# Altium PCB CTR-Dome-Rev-A.PcbDoc
Units mil, origin at the board's own origin, x right, y up, seen from the top; angles counter-clockwise.
Board outline 2755.91 x 2755.91 mil, 2 copper layers (Top Layer, q), stack 61.2 mil thick; 35 components, 26 nets, 112 pads, 51 vias.
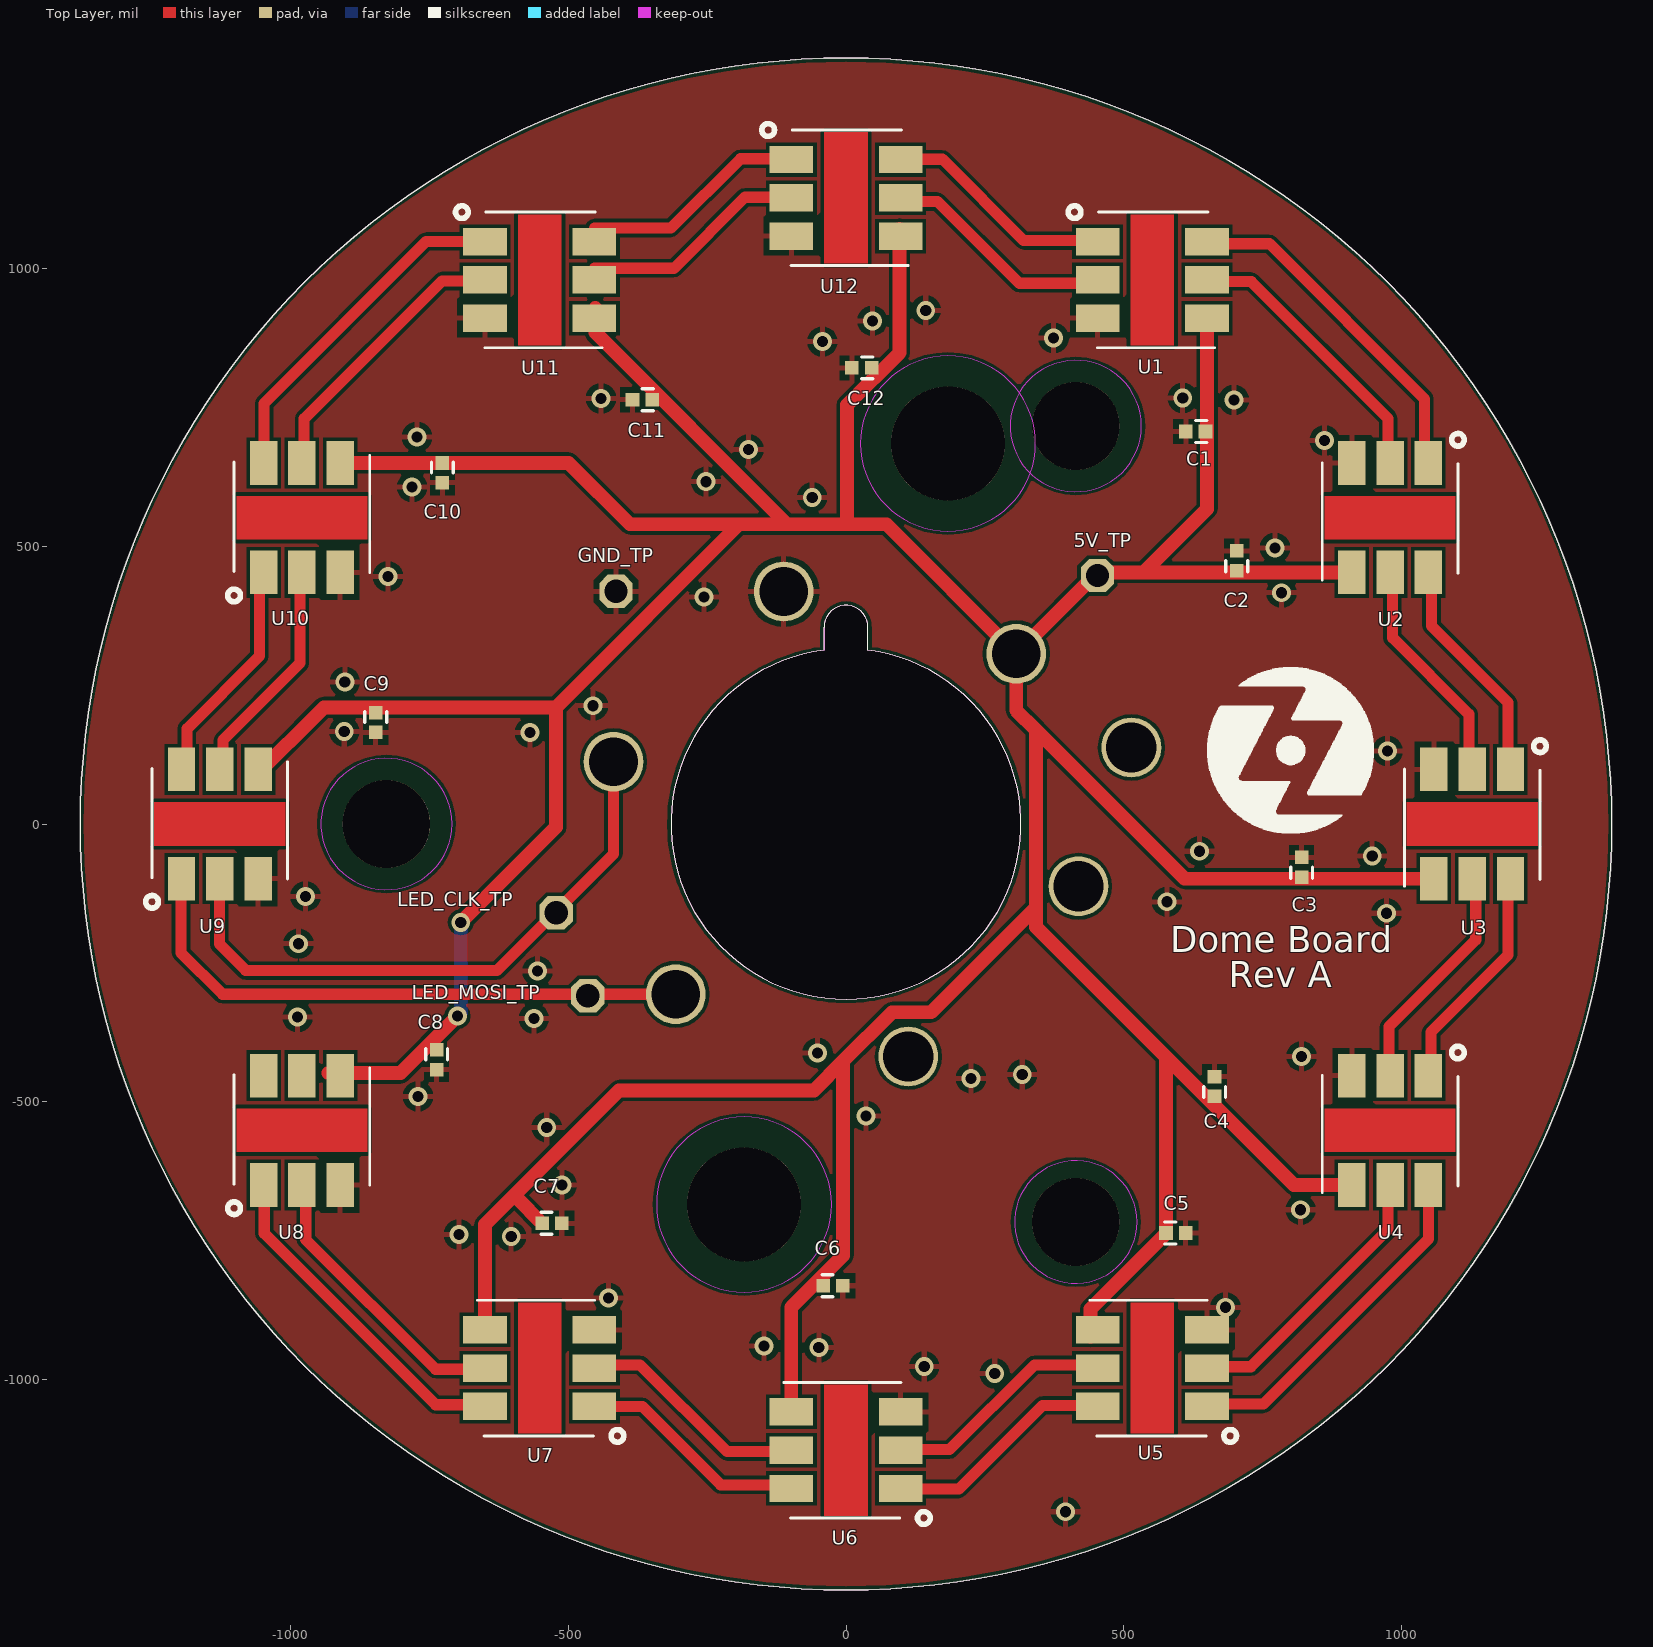
[diagram p0: Top Layer view]
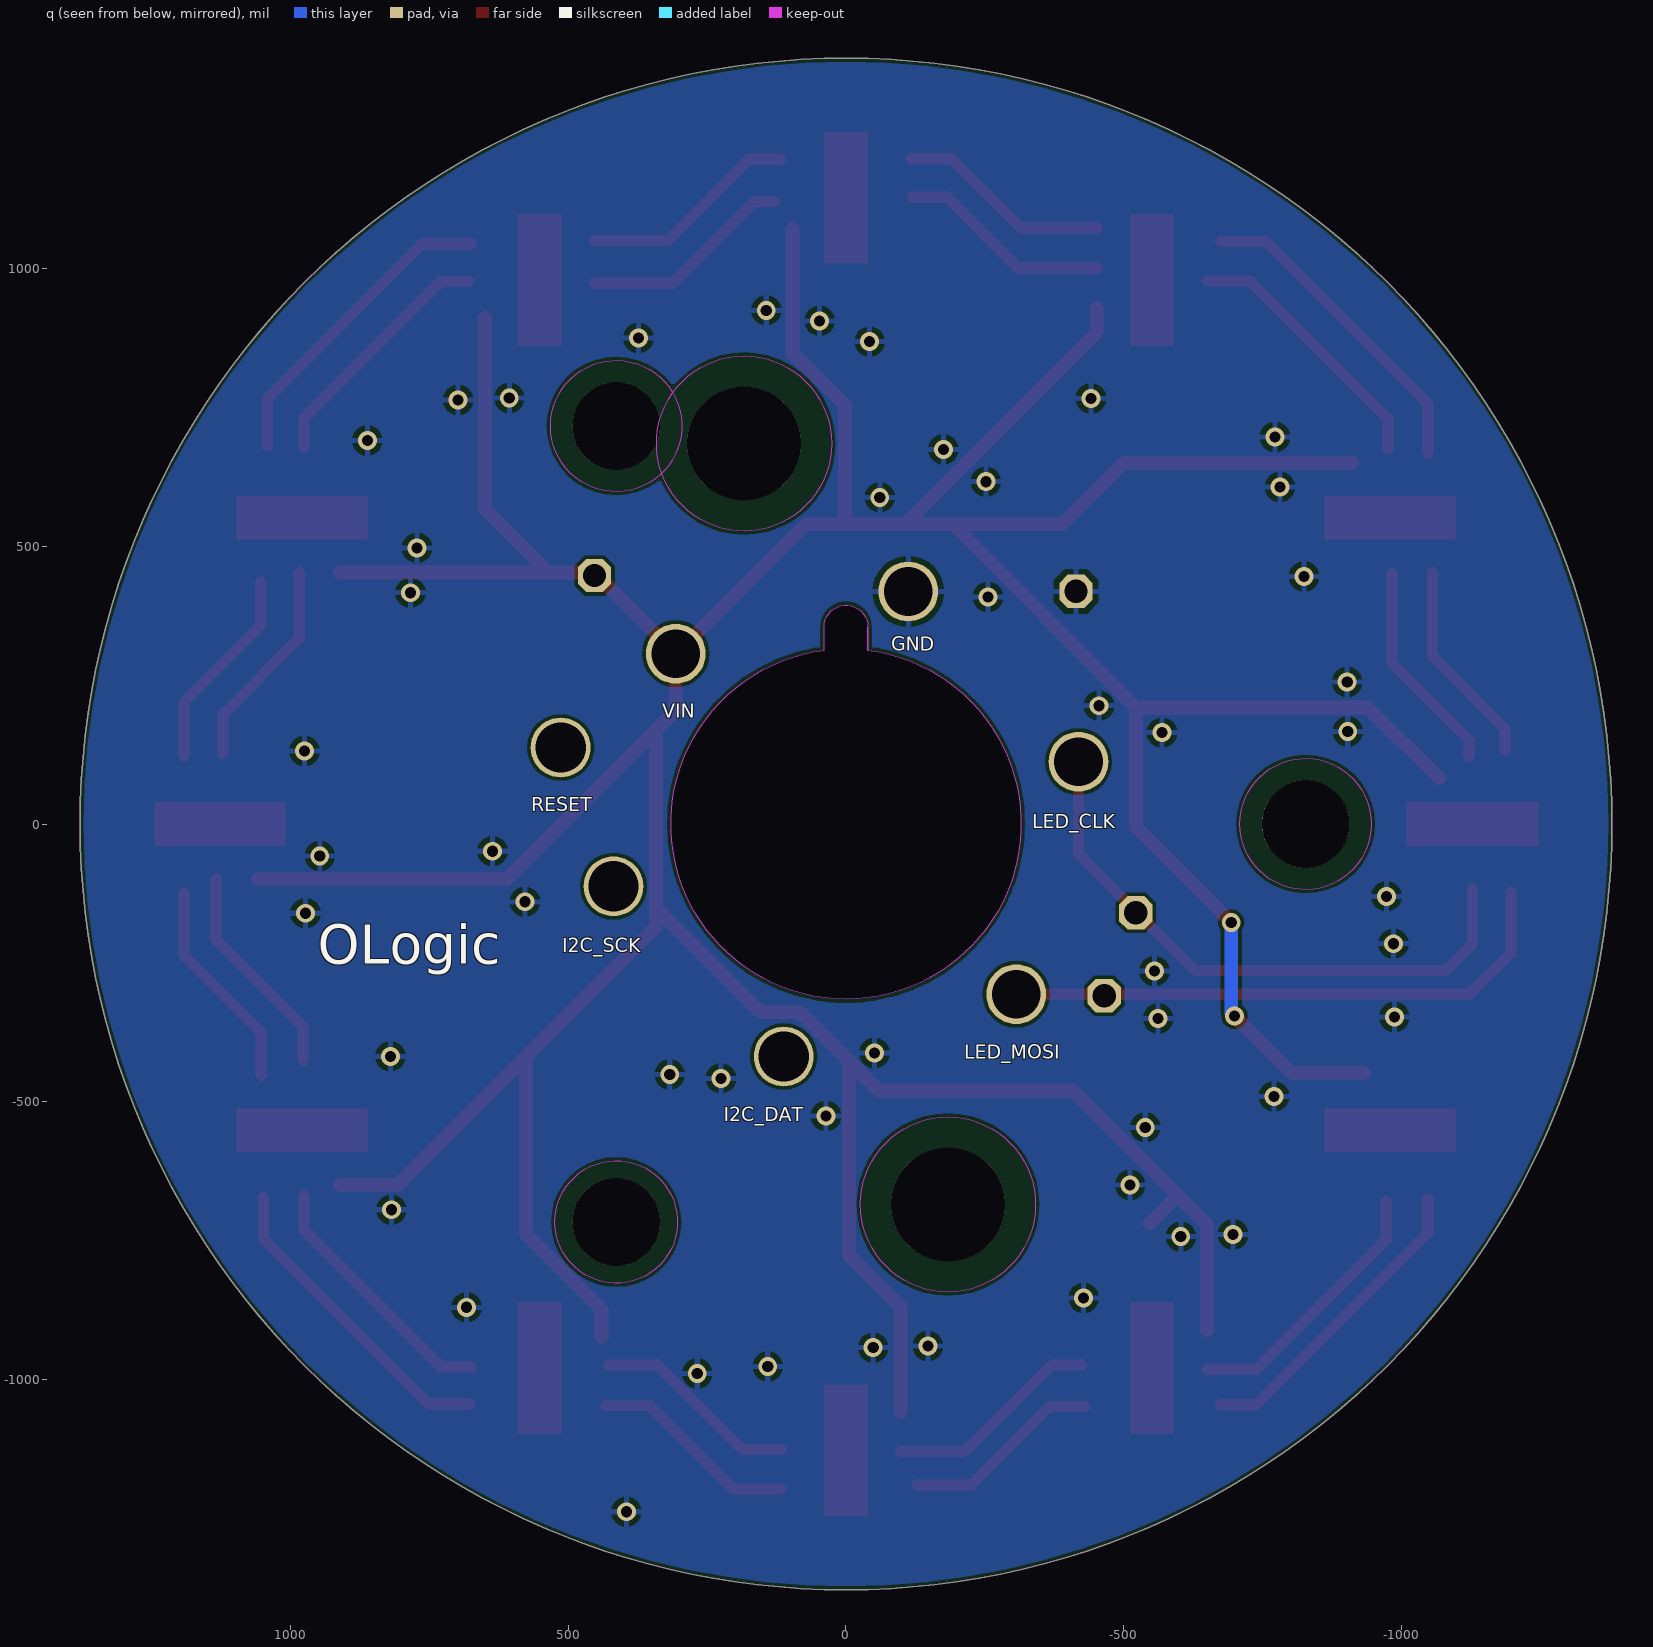
[diagram p1: q view, seen from below]
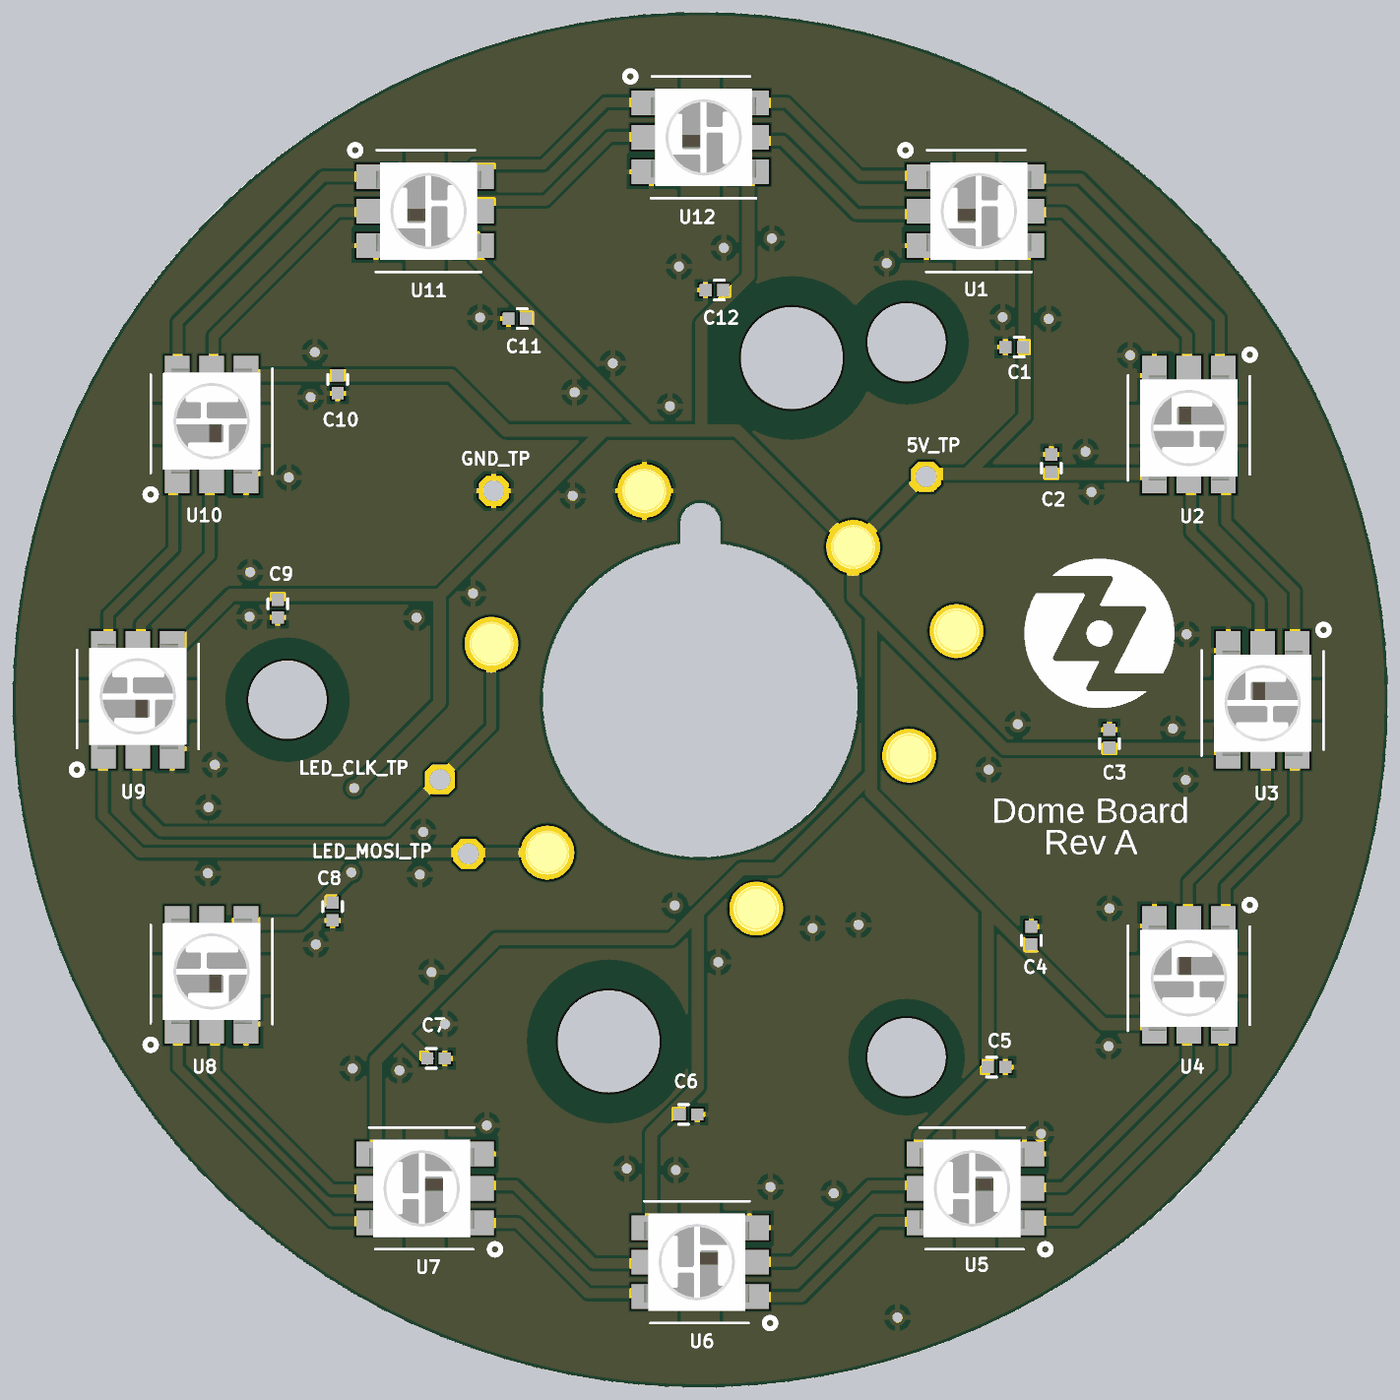
[diagram p2: 3D render of the assembled board from above, using the file's embedded part models]

## Layer stack, top to bottom
Top Solder: solder mask 0.4, Solder Resist, Dk 3.5
Top Layer: signal copper 1.8
Dielectric1: core 57.6, Dk 4.2
q: signal copper 1.8
Bottom Solder: solder mask 0.4, Solder Resist, Dk 3.5

## Board outline
-1377.95,0 ccw(c0,0) 0,-1377.95 ccw(c0,0) 1377.95,0 ccw(c0,0) 0,1377.95 ccw(c0,0)
cut-out: -39.37,312.49 ccw(c0,0) 39.37,312.49 39.37,354.33 ccw(c0,354.33) -39.37,354.33

## Design rules (kind name [scope] priority, off if disabled: settings)
Clearance [All] p1: gap=6 ignorepadtopadclearanceinfootprint=FALSE except(0: Arc-Hole Track-Hole SMDPad-Hole THPad-Hole Via-Hole Fill-Hole Poly-Hole Region-Hole Text-Hole)
ComponentClearance ComponentClearance_BAT [InComponent('BT1') vs InComponent('CN3')] p1: gap=0 collisioncheckmode=3 verticalgap=0 showdistances=FALSE
ComponentClearance [All] p2: gap=7 collisioncheckmode=3 verticalgap=7 showdistances=FALSE
HoleSize [All] p1: absolutevalues=TRUE maxlimit=300 minlimit=10 maxpercent=80.000 minpercent=20.000
HoleToHoleClearance [All] p1: gap=7 allowstackedmicrovias=TRUE
MinimumSolderMaskSliver [InNet('VIN')] p1: minsoldermaskwidth=0.5
NetAntennae NetAntennae_ANT [InNetClass('ANT')] p1: netantennaetolerance=0
NetAntennae [All] p2: netantennaetolerance=0
PolygonConnect [All] p1: connectstyle=Relief reliefconductorwidth=10 reliefentries=4 polygonreliefangle="90 Angle" airgapwidth=10
RoutingVias [All] p1: holewidth=20 width=34 viastyle="Through Hole" minholewidth=10 minwidth=22 maxholewidth=35 maxwidth=50
SMDNeckDown [All] p1: percent=120.000
SilkToBoardRegionClearance [InNet('3.3V')] p1:
SilkToSilkClearance [All] p1: silktosilkclearance=0
SilkToSolderMaskClearance [IsPad] p1: minsilkscreentomaskgap=0 clearancetoexposedcopper=TRUE
SolderMaskExpansion [All] p1: expansion=4
Width Width_BT [InNetClass('BT')] p1: maxlimit=40 minlimit=10 preferedwidth=15
Width Width_VDD [InNet('3.3V')] p2: maxlimit=20 minlimit=7 preferedwidth=10
Width [All] p3: maxlimit=30 minlimit=6 preferedwidth=7
22 further rules are at their usual default settings.

## Classes and differential pairs
component class IMU: 5V_TP GND_TP LED_CLK_TP LED_MOSI_TP
component class CTR-Dome-Rev-A-Leds-1: 5V_TP C1 C2 C3 C4 C5 C6 C7 C8 C9 C10 C11 C12 GND GND_TP I2C_DAT I2C_SCK LED_CLK LED_CLK_TP LED_MOSI LED_MOSI_TP RESET U1 U4 U5 U6 U7 U8 U9 U10 U11 U12 VIN
component class LED: C1 C2 C3 C4 C5 C6 C7 C8 C9 C10 C11 C12 U1 U2 U3 U4 U5 U6 U7 U8 U9 U10 U11 U12

## Components (designator, comment, footprint, x,y, rotation, side; value= is the part's Value field where it differs from the comment)
5V_TP "Test Point" "TestPoint-TH 42 mil" 452.44,446.96 r90 top
C1 "1uF" CAPC0402(1005)_N 629.08,706.17 r180 top
C2 "1uF" CAPC0402(1005)_N 703.17,473.68 r90 top
C3 "1uF" CAPC0402(1005)_N 819.68,-77.87 r90 top
C4 "1uF" CAPC0402(1005)_N 663.03,-472.31 r90 top
C5 "1uF" CAPC0402(1005)_N 593.42,-735.87 r0 top
C6 "1uF" CAPC0402(1005)_N -23.57,-830.71 r0 top
C7 "1uF" CAPC0402(1005)_N -529.12,-718.38 r0 top
C8 "1uF" CAPC0402(1005)_N -736.54,-424.23 r270 top
C9 "1uF" CAPC0402(1005)_N -846.14,182.48 r270 top
C10 "1uF" CAPC0402(1005)_N -726.15,631.72 r270 top
C11 "1uF" CAPC0402(1005)_N -366.43,763.42 r180 top
C12 "1uF" CAPC0402(1005)_N 28.25,820.63 r180 top
GND "Pogo Pin" POGO_PIN#1 -112.09,418.31 r90 bottom
GND_TP "Test Point" "TestPoint-TH 42 mil" -413.7,418.51 r90 top
I2C_DAT "Pogo Pin" POGO_PIN#2 112.09,-418.31 r90 bottom
I2C_SCK "Pogo Pin" POGO_PIN#2 418.31,-112.09 r90 bottom
LED_CLK "Pogo Pin" POGO_PIN#1 -418.31,112.09 r90 bottom
LED_CLK_TP "Test Point" "TestPoint-TH 42 mil" -521.42,-159.97 r90 top
LED_MOSI "Pogo Pin" POGO_PIN#1 -306.22,-306.22 r90 bottom
LED_MOSI_TP "Test Point" "TestPoint-TH 42 mil" -464.39,-308.71 r90 top
RESET "Pogo Pin" POGO_PIN#2 513.39,137.56 r90 bottom
U1 "APA102" APA102C 551.18,978.89 r0 top
U2 "APA102" APA102C 978.89,551.18 r270 top
U3 "APA102" APA102C 1126.57,0 r270 top
U4 "APA102" APA102C 978.89,-551.18 r270 top
U5 "APA102" APA102C 551.18,-978.89 r180 top
U6 "APA102" APA102C 0,-1126.57 r180 top
U7 "APA102" APA102C -551.18,-978.89 r180 top
U8 "APA102" APA102C -978.9,-551.18 r90 top
U9 "APA102" APA102C -1126.57,0 r90 top
U10 "APA102" APA102C -978.9,551.18 r90 top
U11 "APA102" APA102C -551.18,978.89 r0 top
U12 "APA102" APA102C 0,1126.57 r0 top
VIN "Pogo Pin" POGO_PIN#1 306.22,306.22 r90 bottom

## Footprints (in the part's own frame and the unit in brackets; to place one, negate y for a bottom-side part, rotate by r counter-clockwise, add the part's x,y. Pads: shape width x height; smd on the part's side, far side on the other; paste and mask are expansions set on the pad)
APA102C [mm] "APA102C RGB LED"
  rect 2x1.25 smd: 1(-2.5,1.75) 2(-2.5,0) 3(-2.5,-1.75) 4(2.5,-1.75) 5(2.5,0) 6(2.5,1.75)
  Top Layer region: -1,-3 1,-3 1,3 -1,3
  silkscreen extent -3.84,-3.1 2.84,3.39, body extent -2.5,-2.47 2.85,2.47, height 1.7
CAPC0402(1005)_N [mm] "Chip Capacitor, Body 1.0x0.5mm, Height 0.7mm, IPC Medium Density"
  rect 0.62x0.62 smd: 1(-0.45,0) 2(0.45,0)
  silkscreen extent -0.5,-0.5 0,0.5, body extent -0.55,-0.3 0.55,0.3, height 0.7
POGO_PIN#1 [mil] "Through-hole pogo pin"
  round 107.76 hole 87.74: 1(0,0)
  body extent -76,-76 77,77, height 220
POGO_PIN#2 [mil] "Through-hole pogo pin"
  round 107.76 hole 90.55: 1(0,0)
  body extent -76,-76 77,77, height 220
"TestPoint-TH 42 mil" [mil] "Test Point - Thru-Hole 42 mil"
  oct 60x60 hole 42: 1(0,0)

## Part data
5V_TP GND_TP LED_CLK_TP LED_MOSI_TP: library part "TestPoint, small", ClassName=IMU
C1 C2 C3 C4 C5 C6 C7 C8 C9 C10 C11 C12: library part "CAP CER 1UF 16V 10% X5R 0402", "1UF 0402", Capacitance=1.0µF, Manufacturer="TDK Corporation", Manufacturer Part Number=C1005X5R1C105K050BC, Operating Temperature="-55°C ~ 85°C", Package / Case="0402 (1005 Metric)", Ratings=-, Supplier Part Number 1=445-4978-1-ND, Temperature Coefficient=X5R, Tolerance=±10%, Voltage - Rated=16V, Applications="General Purpose", Category=Capacitors, ClassName=LED, ComponentLink1Description=http://product.tdk.com/en/catalog/datasheets/mlcc_commercial_general_en.pdf, ComponentLink1URL=http://product.tdk.com/en/catalog/datasheets/mlcc_commercial_general_en.pdf, Features=-, Height - Seated (Max)=-, Lead Spacing=-, Lead Style=-, Mounting Type="Surface Mount, MLCC", Packaging="Cut Tape (CT)", Pricing 1="1=0.12, 10=0.08, 100=0.038, 250=0.032, 500=0.0268, 1000=0.022, 5000=0.0186 (USD)", RoHS="RoHS Compliant", Size / Dimension="0.039\" L x 0.020\" W (1.00mm x 0.50mm)", Stock 1=490204, Supplier 1=Digi-Key, Thickness (Max)="0.022\" (0.55mm)"
GND I2C_DAT I2C_SCK LED_CLK LED_MOSI RESET VIN: library part 0850-0-15-20-83-14-11-0, Manufacturer="Mill-Max Manufacturing Corp.", Supplier Part Number 1=ED90436-ND, Category="Connectors, Interconnects", ComponentLink1Description=http://www.mill-max.com/assets/pdfs/028.pdf, ComponentLink1URL=http://www.mill-max.com/assets/pdfs/028.pdf, Manufacturer Part Number=0850-0-15-20-83-14-11-0, Material="Copper Alloy", Mounting Type="Through Hole", Part Status=Active, Plating=Gold, Plating - Thickness="20µin (0.51µm)", Pricing 1="1=1.89, 10=1.47, 25=1.3708, 50=1.246, 100=1.1214, 250=0.94696, 500=0.89712, 1000=0.79744, 2500=0.66287 (USD)", RoHS="RoHS Compliant", Stock 1=38651, Supplier 1=Digi-Key
U1 U2 U3 U4 U5 U6 U7 U8 U9 U10 U11 U12: "APA102 RGB LED with serial controller", Manufacturer="Shiji Lighting", MPN=APA102C, ClassName=LED

## Free pads (board coordinates)
  round 157.48 hole 157.48 unplated: 1(-826.77,0) 1(413.39,-716.02) 1(413.39,716.02)
  round 204.72 hole 204.72 unplated: 1(-183.43,-684.53) 1(183.43,684.53)

## Via types
v1: diameter 34, hole 20, Top Layer to q, tented both sides, 51 vias

## Nets (pads, with @x,y where several pads share a name; then routed paths per layer and width w, separated by ;. In a path a pad name is that pad's centre, name@x,y a point inside that pad or via, vN(x,y) a via of type N, cw(c..) or ccw(c..) an arc to the next point about the centre after c; other vN are vias at no path point)
5V: 5V_TP.1 C1.1 C2.1 C3.1 C4.1 C5.1 C6.1 C7.1 C8.1 C9.1 C10.1 C11.1 C12.1 U1.4 U2.4 U3.4 U4.4 U5.4 U6.4 U7.4 U8.4 U9.4 U10.4 U11.4 U12.4 VIN.1 | length 10407.4
  Top Layer w25: U9.4@-1066.75,82.5 -939.37,209.88 -522.01,209.88 ; U8.4@-931.25,-448.23 -801.49,-448.23 v1(-699.03,-345.77) ; U10.4 -498.89,649.61 -388.56,539.28 -192.62,539.28 ; v1(-693.16,-176.97) -522.01,-5.82 -522.01,209.88 ; U7.4 -649.61,-720.71 -602.15,-673.25 ; C7.1 -591.97,-673.25 -602.15,-673.25 ; U11.4@-451.07,928.84 -451.07,884.1 -106.24,539.28 ; U6.4 -98.43,-869.37 -5.05,-775.99 -5.05,-426.64 ; U12.4@96.26,1070.59 96.26,847.79 1.98,753.52 1.98,539.28 ; 344.47,166.32 609.22,-98.43 U3.4 ; U5.4@440.11,-922.35 440.11,-872.59 575.71,-737 C5.1 575.71,-419 ; U1.4 649.61,567 535.36,452.76 ; U4.4 806.31,-649.61 575.71,-419 ; U2.4 535.36,452.76 ; -602.15,-673.25 -408.3,-479.4 -57.81,-479.4 -5.05,-426.64 ; -522.01,209.88 -192.62,539.28 ; -192.62,539.28 -106.24,539.28 ; -106.24,539.28 1.98,539.28 ; -5.05,-426.64 82.86,-338.73 153.22,-338.73 342.09,-149.85 ; 1.98,539.28 73.16,539.28 VIN.1 ; VIN.1 452.76,452.76 535.36,452.76 ; VIN.1 306.22,204.57 342.09,168.7 342.09,-149.85 ; 342.09,-149.85 342.09,-185.39 575.71,-419
  q w25: v1(-699.03,-345.77) -693.16,-339.91 v1(-693.16,-176.97)
CI: U1.5 U2.2 | length 449.7
  Top Layer w20: U1.5@679.27,976.14 729.01,976.14 975.33,729.83 U2.2@975.33,678.22
CI1: U2.5 U3.2 | length 383.8
  Top Layer w20: U2.5@982.99,452.76 982.99,335.12 1120.7,197.41 U3.2@1120.7,126.01
CO1: U3.5 U4.2 | length 392.4
  Top Layer w20: U4.2@976.87,-426.19 976.87,-364.73 1132.94,-208.65 U3.5@1132.94,-98.43
DI: U1.6 U2.1 | length 566.6
  Top Layer w20: U1.6@674.81,1044.03 761.52,1044.03 1040.62,764.93 U2.1@1040.62,679.74
DI1: U2.6 U3.1 | length 370
  Top Layer w20: U2.6@1053.37,435.36 1053.37,356.32 1191.08,218.6 U3.1@1191.08,122.45
DO1: U3.6 U4.1 | length 386.7
  Top Layer w20: U4.1@1052.36,-452.76 1052.36,-374.45 1191.08,-235.73 U3.6@1191.08,-123.47
GND: C1.2 C2.2 C3.2 C4.2 C5.2 C6.2 C7.2 C8.2 C9.2 C10.2 C11.2 C12.2 GND.1 GND_TP.1 U1.3 U2.3 U3.3 U4.3 U5.3 U6.3 U7.3 U8.3 U9.3 U10.3 U11.3 U12.3
  other v1: 395.18,-1237.35 267.64,-988.49 140.73,-975.9 -48.93,-942.09 -147.33,-939.1 682.64,-869.53 -427.63,-852.63 -602.34,-742.42 -696.32,-738.54 817.93,-693.98 -511.28,-649.41 -538.4,-545.75 36.1,-525.4 -769.94,-490.05 225.03,-457.58 317.05,-450.81 819.71,-418.01 -51.08,-412.05 -561.65,-350.05 -986.51,-347.42 -554.86,-264.79 -985.02,-215.39 972.46,-160.56 577.71,-139.96 -972.43,-130.13 946.72,-57.58 636.06,-49 974.18,131.21 -568.43,164.39 -902.68,166.31 -455.07,212.84 -901.7,255.45 -255.5,408.53 783.67,416.12 -824.19,445.35 771.65,496.78 -60.78,587.75 -780.6,606.16 -251.64,615.85 -175.1,673.98 861.12,690.06 -771.88,696.26 697.85,762.81 -440.85,765.69 605.79,766.52 -42.54,867.82 373.47,874.37 47.37,905.26 143.49,924.14
LED_CLK: LED_CLK.1 LED_CLK_TP.1 U9.2 | length 1080.7
  Top Layer w20: U9.2@-1127.43,-117.31 -1127.43,-216.21 -1079.82,-263.82 -628.21,-263.82 -418.31,-53.92 LED_CLK.1
LED_MOSI: LED_MOSI.1 LED_MOSI_TP.1 U9.1 | length 1030.5
  Top Layer w20: U9.1@-1196.41,-122.27 -1196.41,-231.74 -1121.93,-306.22 LED_MOSI.1
NetU1_1: U1.1 U12.6 | length 395.4
  Top Layer w20: U12.6@117.97,1196.05 173.2,1196.05 319.61,1049.64 U1.1@452.76,1049.64
NetU1_2: U1.2 U12.5 | length 385.5
  Top Layer w20: U12.5@128.26,1120.04 164.54,1120.04 311.81,972.78 U1.2@452.76,972.78
NetU4_5: U4.5 U5.2 | length 464.7
  Top Layer w20: U5.2@674.84,-976.38 728.93,-976.38 975.34,-729.97 U4.5@975.34,-667.87
NetU4_6: U4.6 U5.1 | length 569
  Top Layer w20: U5.1@676.51,-1043.7 751.09,-1043.7 1048.27,-746.53 U4.6@1048.27,-672.38
NetU5_5: U5.5 U6.2 | length 372.7
  Top Layer w20: U6.2@116.37,-1125.61 186.33,-1125.61 338.93,-973.01 U5.5@425.84,-973.01
NetU5_6: U5.6 U6.1 | length 377.4
  Top Layer w20: U6.1@116.92,-1196.32 203.31,-1196.32 353.67,-1045.95 U5.6@432.01,-1045.95
NetU6_5: U6.5 U7.2 | length 390.1
  Top Layer w20: U7.2@-423.87,-973 -370.37,-973 -214.39,-1128.98 U6.5@-98.43,-1128.98
NetU6_6: U6.6 U7.1 | length 360
  Top Layer w20: U7.1@-429.19,-1048.19 -366.09,-1048.19 -225.27,-1189.02 U6.6@-127.48,-1189.02
NetU7_5: U7.5 U8.2 | length 487.2
  Top Layer w20: U8.2@-972,-679.23 -972,-747.32 -738.46,-980.86 U7.5@-649.61,-980.86
NetU7_6: U7.6 U8.1 | length 561.4
  Top Layer w20: U8.1@-1046.57,-675.56 -1046.57,-736.72 -738.46,-1044.83 U7.6@-673.9,-1044.83
NetU9_5: U9.5 U10.2 | length 388.3
  Top Layer w20: U9.5@-1120.81,121.7 -1120.81,151.07 -982.51,289.38 U10.2@-982.51,452.76
NetU9_6: U9.6 U10.1 | length 374.1
  Top Layer w20: U9.6@-1185.96,132.72 -1185.96,171.34 -1055.32,301.98 U10.1@-1055.32,452.76
NetU10_5: U10.5 U11.2 | length 481.5
  Top Layer w20: U10.5@-974.85,675.45 -974.85,729.02 -726.98,976.89 U11.2@-649.61,976.89
NetU10_6: U10.6 U11.1 | length 582.3
  Top Layer w20: U10.6@-1046.96,667.57 -1046.96,756.5 -755.29,1048.17 U11.1@-674.41,1048.17
NetU11_5: U11.5 U12.2 | length 385.7
  Top Layer w20: U11.5@-452.76,999.78 -309.8,999.78 -181.98,1127.61 U12.2@-119.96,1127.61
NetU11_6: U11.6 U12.1 | length 387.2
  Top Layer w20: U11.6@-452.76,1072.22 -314.73,1072.22 -190.11,1196.85 U12.1@-117.19,1196.85
pads on no net: I2C_DAT.1 I2C_SCK.1 RESET.1 U8.5 U8.6

## Polygon pours and split planes (outlines as drawn)
GND on Top Layer "GND_L01_P002" (solid, remove dead copper, pour order 2): -1464.99,1425.57 787.53,1425.57 802.22,1410.88 1463.29,749.81 1463.29,142.61 1463.29,-631.07 640.62,-1453.74 611.24,-1424.36 -1063.44,-1424.36 -1092.85,-1424.36 -1430.71,-1086.49
GND on q "GND_L02_P004" (solid, remove dead copper, pour order 4): -1240.31,966.3 -656.15,1550.46 -630.93,1550.46 528.95,1550.46 1382.07,697.34 1428.29,651.12 1428.29,-962.65 1129.91,-962.65 764.3,-1328.27 667.65,-1424.92 -849.46,-1424.92 -849.46,-1290.46 -1273.93,-865.99 -1492.46,-647.46 -1492.46,256.08

## Keep-outs
Keep-Out Layer:
  circle w0.5: c-183.43,-684.53 r157.48
  circle w0.5: c413.39,-716.02 r110.24
  circle w0.5: c413.39,716.02 r118.11
  circle w0.5: c183.42,684.53 r157.48
  circle w0.5: c-826.77,0 r118.11
  lines w1: -1377.95,0 cw(c0,0) 0,1377.95 cw(c0,0) 1377.95,0 cw(c0,0) 0,-1377.95 cw(c0,0) -1377.95,0 ; -39.37,312.49 ccw(c0,0) 39.37,312.49 39.37,354.33 ccw(c0,354.33) -39.37,354.33 -39.37,312.49

## Silkscreen, mask and mechanical layers (free items; w line width, h text height)
Top Overlay:
  drawing of 521 lines, arcs and shapes, not listed
  text "Dome Board" at 583.41,-246.22 h80
  text "Rev A" at 688.18,-309.39 h80
Bottom Overlay:
  text "OLogic" at 950.7,-274.49 h120
Mechanical 1:
  circle w0.5: c0,0 r1377.95
  lines w0.5: -39.37,312.49 ccw(c0,0) 39.37,312.49 39.37,354.33 ccw(c0,354.33) -39.37,354.33 -39.37,312.49